# Altium PCB Doublewide.PcbDoc (part 2 of 2)
Units mm, origin at the board's own origin, x right, y up, seen from the top; angles counter-clockwise.
Board outline 97.5 x 70 mm, 6 copper layers (Top (GND), L2-HS, L3-GND, L4-PWR, L5, Bot), stack 1.744 mm thick; 113 components, 172 nets, 522 pads, 114 vias.
Unrouted connection lines stored in the file: 204.
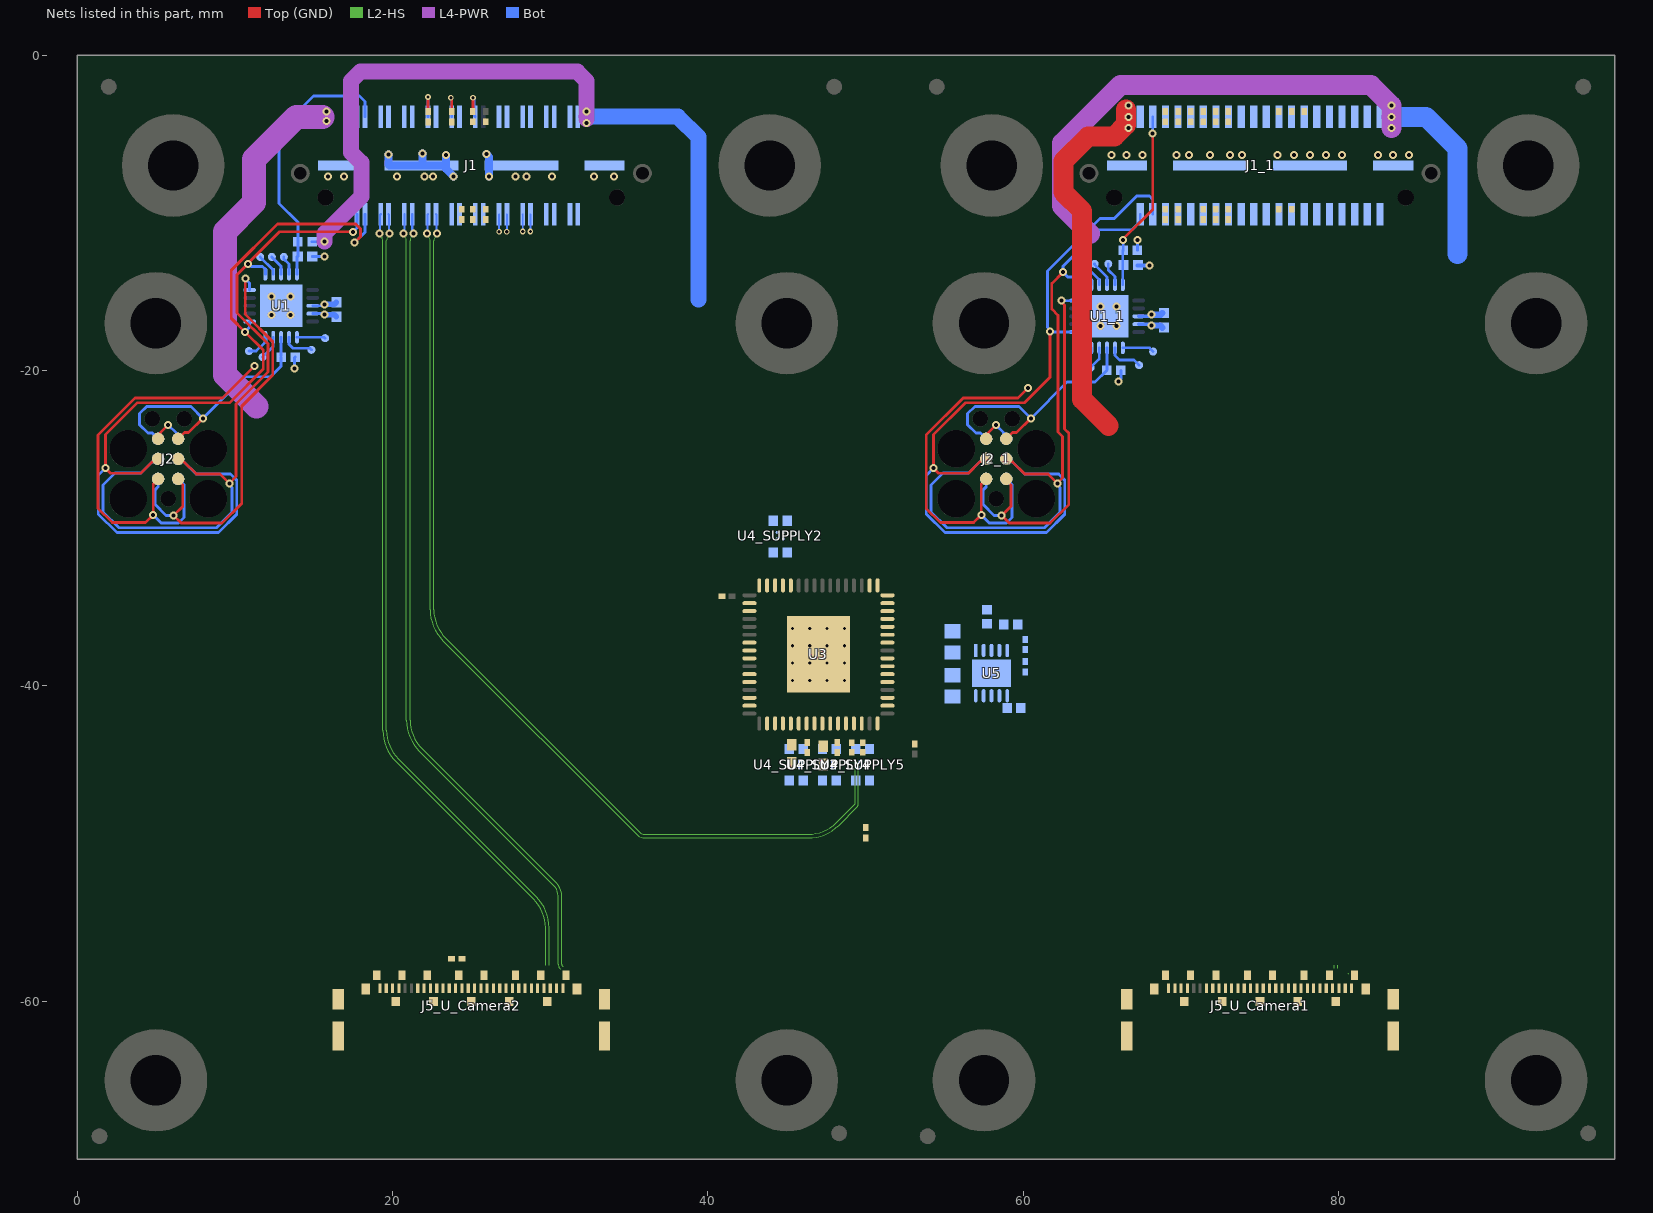
[diagram p4: the nets of this part, all layers, seen from the top]

## Part data
C1 C1_1 C2 C2_1: library part 000070, "Ceramic capacitor", Manufacturer=Kemet, Tolerance (%)=10, ValueFloat=1E-7, Description 2="SM-0402, 10%, 10v", Manufacturer_PN=C0402C104K8PACTU, partnumber=000070
  C1 C1_1: updated_on="5/15/2017 4:50:04 PM"
  C2 C2_1: updated_on="11/17/2016 12:16:56 PM"
C5_SUPPLY2 C5_SUPPLY3 C5_SUPPLY4 C5_SUPPLY5 C6_SUPPLY2 C6_SUPPLY3 C6_SUPPLY4 C6_SUPPLY5 C9 C10 C11: library part GRM155R61A475MEAAD, "CAP CER 4.7UF 10V X5R 0402", Device Package="0402 (1005 Metric)", Manufacturer="Murata Electronics", Operating Temperature="-55°C ~ 85°C", Supplier Part Number 1=490-14306-1-ND, Temperature Coefficient=X5R, Tolerance=±20%, Voltage - Rated=10V, Applications="General Purpose", Capacitance=4.7µF, ComponentLink1Description=Datasheet, ComponentLink1URL=https://search.murata.co.jp/Ceramy/image/img/A01X/G101/ENG/GRM155R61A475MEAA-01.pdf, ComponentLink2Description="DigiKey Link", ComponentLink2URL=https://www.digikey.com/en/products/detail/murata-electronics/GRM155R61A475MEAAD/6234735, LastUpdated="2/8/2022 12:26:50 PM", Lifecycle Status=Active, Minimum Order=1, Mounting Type="Surface Mount, MLCC", Package / Case="0402 (1005 Metric)", Packaging=TapeAndReel, Part Number=GRM155R61A475MEAAD, Part Status=Active, PartId=6746, Price=0.03, Series=GRM, Size / Dimension="0.039\" L x 0.020\" W (1.00mm x 0.50mm)", Supplier 1=DigiKey, Thickness (Max)="0.026\" (0.65mm)"
C7 C8: library part GRM188R60J476ME01D, "CAP CER 47UF 6.3V X5R 0603", Device Package="0603 (1608 Metric)", Manufacturer="Murata Electronics", Operating Temperature="-55°C ~ 85°C", Supplier Part Number 1=490-GRM188R60J476ME01DCT-ND, Temperature Coefficient=X5R, Tolerance=±20%, Voltage - Rated=6.3V, Applications="General Purpose", Capacitance="47 µF", ComponentLink2Description="DigiKey Link", ComponentLink2URL=https://www.digikey.com/en/products/detail/murata-electronics/GRM188R60J476ME01D/13996874, LastUpdated="5/20/2022 2:38:45 PM", Lifecycle Status=Active, Minimum Order=1, Mounting Type="Surface Mount, MLCC", Package / Case="0603 (1608 Metric)", Packaging=TapeAndReel, Part Number=GRM188R60J476ME01D, Part Status=Active, PartId=44498, Price=0.10, Series=GRM, Size / Dimension="0.063\" L x 0.031\" W (1.60mm x 0.80mm)", Supplier 1=DigiKey, Thickness (Max)="0.039\" (1.00mm)"
C14 C15: library part 0201YC103KAT2A, "CAP CER 10000PF 16V X7R 0201", Device Package="0201 (0603 Metric)", Manufacturer="AVX Corporation", Operating Temperature="-55°C ~ 125°C", Supplier Part Number 1=478-10775-1-ND, Temperature Coefficient=X7R, Tolerance=±10%, Voltage - Rated=16V, Applications="General Purpose", Capacitance=10000pF, ComponentLink1Description=Datasheet, ComponentLink1URL=http://datasheets.avx.com/X7RDielectric.pdf, ComponentLink2Description="DigiKey Link", ComponentLink2URL=http://digikey.com/product-detail/en/avx-corporation/0201YC103KAT2A/478-10775-1-ND/7536319, LastUpdated="9/2/2020 1:00:07 AM", Lifecycle Status=Active, Minimum Order=1, Mounting Type="Surface Mount, MLCC", Package / Case="0201 (0603 Metric)", Packaging=TapeAndReel, Part Number=0201YC103KAT2A, Part Status=Active, PartId=145, Price=0.09, Series=-, Size / Dimension="0.024\" L x 0.012\" W (0.60mm x 0.30mm)", Supplier 1=DigiKey, Thickness (Max)="0.013\" (0.33mm)"
FID1 FID1_1 FID2 FID2_1 FID3 FID3_1 FID4 FID4_1 FID5 FID5_1 FID6 FID6_1 FID7 FID7_1 FID8 FID8_1: "PCB fiducial"
J1: library part 001605, "0.5mm hi-speed, high-density header (female)", Manufacturer=Samtec, Manufacturer_PN=QTH-020-01-F-D-DP-A, AligniPartNumber=001605, parttype=Connector
J1_1: library part 000973, Manufacturer=Samtec, created_on="4/3/2013 1:34:16 PM", id=24153, inventory_price=3.86, Manufacturer_PN=QTE-020-01-F-D-A, partnumber=000973, parttype=Connector, RoHS=1, updated_on="2/26/2018 2:13:14 PM"
J2 J2_1: library part 002062, "Tag-Connect 6-pin Plug-of-Nails spring-pin cable footprint", Manufacturer=Tag-Connect, Manufacturer_PN=TC2030-IDC, AligniPartNumber=002062, parttype=Connector
J5_U_Camera1 J5_U_Camera2: library part CMP-004-000000-1, "Cabline-CAII Rece. Ass'y", Package=None, Availability=Unavailable, Design Item ID=20682-030E-02, MF="{'manufacturer': u'I-PEX'}", MP=20682-030E-02, Price=None, Source=20682-030E-02.SchLib
MH1 MH1_1 MH2 MH2_1 MH3 MH3_1 MH4 MH4_1 MH5 MH5_1 MH6 MH6_1: "Mounting hole"
R1 R1_1 R2 R2_1: library part 001521, "Thick-film resistor", Manufacturer=Vishay, Tolerance (%)=1, ValueFloat=10000, Description 2="SM-0402, 1%, 1/16W", Manufacturer_PN=CRCW040210K0FKED, partnumber=001521, updated_on="3/21/2017 2:29:49 PM", x_lifecycle_status=Production
R3_U_Camera1 R3_U_Camera2: library part ERJ-U01J103C, "RES 10K OHM 5% 1/20W 0201 SMD", Device Package="0201 (0603 Metric)", Manufacturer="Panasonic Electronic Components", Operating Temperature="-55°C ~ 125°C", Power (Watts)="0.05W, 1/20W", Supplier Device Package=0201, Supplier Part Number 1=10-ERJ-U01J103CCT-ND, Temperature Coefficient=±200ppm/°C, Tolerance=±5%, ComponentLink1Description=Datasheet, ComponentLink1URL=https://industrial.panasonic.com/cdbs/www-data/pdf/RDP0000/AOA0000C334.pdf, ComponentLink2Description="DigiKey Link", ComponentLink2URL=https://www.digikey.com/en/products/detail/panasonic-electronic-components/ERJ-U01J103C/11635419, Composition="Thick Film", Features=Anti-Sulfur, Height - Seated (Max)="0.010\" (0.26mm)", LastUpdated="5/23/2022 1:02:10 PM", Lifecycle Status=Active, Minimum Order=1, Number of Terminations=2, Package / Case="0201 (0603 Metric)", Packaging=TapeAndReel, Part Number=ERJ-U01J103C, Part Status=Active, PartId=57694, Price=0.03, Resistance="10 kOhms", Series=ERJ-U01, Size / Dimension="0.024\" L x 0.012\" W (0.60mm x 0.30mm)", Supplier 1=DigiKey
R6: library part ERJ-1GNJ154C, "RES SMD 150K OHM 5% 1/20W 0201", Device Package="0201 (0603 Metric)", Manufacturer="Panasonic Electronic Components", Operating Temperature="-55°C ~ 125°C", Power (Watts)="0.05W, 1/20W", Ratings=AEC-Q200, Supplier Device Package=0201, Supplier Part Number 1=P123248CT-ND, Temperature Coefficient=±200ppm/°C, Tolerance=±5%, ComponentLink1Description=Datasheet, ComponentLink1URL=https://b2b-api.panasonic.eu/file_stream/pids/fileversion/1242, ComponentLink2Description="DigiKey Link", ComponentLink2URL=https://www.digikey.com/en/products/detail/panasonic-electronic-components/ERJ-1GNJ154C/2035839, Composition="Thick Film", Features="Automotive AEC-Q200", Height - Seated (Max)="0.010\" (0.26mm)", LastUpdated="8/11/2022 9:03:25 AM", Lifecycle Status=Active, Minimum Order=1, Number of Terminations=2, Package / Case="0201 (0603 Metric)", Packaging=CutTape, Part Number=ERJ-1GNJ154C, Part Status=Active, PartId=332, Price=0.01, Resistance="150 kOhms", Series=ERJ-1GN, Size / Dimension="0.024\" L x 0.012\" W (0.60mm x 0.30mm)", Supplier 1=DigiKey
R7: library part ERJ-1GNF3013C, "RES SMD 301K OHM 1% 1/20W 0201", Device Package="0201 (0603 Metric)", Manufacturer="Panasonic Electronic Components", Operating Temperature="-55°C ~ 125°C", Power (Watts)="0.05W, 1/20W", Ratings=AEC-Q200, Supplier Device Package=0201, Supplier Part Number 1=P122918CT-ND, Temperature Coefficient=±200ppm/°C, Tolerance=±1%, ComponentLink1Description=Datasheet, ComponentLink1URL=https://industrial.panasonic.com/cdbs/www-data/pdf/RDA0000/AOA0000C304.pdf, ComponentLink2Description="DigiKey Link", ComponentLink2URL=https://www.digikey.com/en/products/detail/panasonic-electronic-components/ERJ-1GNF3013C/2036394, Composition="Thick Film", Features="Automotive AEC-Q200", Height - Seated (Max)="0.010\" (0.26mm)", LastUpdated="8/11/2022 9:03:12 AM", Lifecycle Status=Active, Minimum Order=1, Number of Terminations=2, Package / Case="0201 (0603 Metric)", Packaging=TapeAndReel, Part Number=ERJ-1GNF3013C, Part Status=Active, PartId=2352, Price=0.01, Resistance="301 kOhms", Series=ERJ-1GN, Size / Dimension="0.024\" L x 0.012\" W (0.60mm x 0.30mm)", Supplier 1=DigiKey
R10 R11: library part ERJ-2RKF49R9X, "RES SMD 49.9 OHM 1% 1/10W 0402", Device Package="0402 (1005 Metric)", Manufacturer="Panasonic Electronic Components", Operating Temperature="-55°C ~ 155°C", Power (Watts)="0.1W, 1/10W", Ratings=AEC-Q200, Supplier Device Package=0402, Supplier Part Number 1=P49.9LCT-ND, Temperature Coefficient=±100ppm/°C, Tolerance=±1%, ComponentLink1Description=Datasheet, ComponentLink1URL=https://industrial.panasonic.com/cdbs/www-data/pdf/RDA0000/AOA0000C304.pdf, ComponentLink2Description="DigiKey Link", ComponentLink2URL=https://www.digikey.com/en/products/detail/panasonic-electronic-components/ERJ-2RKF49R9X/192382, Composition="Thick Film", Features="Automotive AEC-Q200", Height - Seated (Max)="0.016\" (0.40mm)", LastUpdated="8/11/2022 9:07:22 AM", Lifecycle Status=Active, Minimum Order=1, Number of Terminations=2, Package / Case="0402 (1005 Metric)", Packaging=CutTape, Part Number=ERJ-2RKF49R9X, Part Status=Active, PartId=17623, Price=0.01, Resistance="49.9 Ohms", Series=ERJ-2RK, Size / Dimension="0.039\" L x 0.020\" W (1.00mm x 0.50mm)", Supplier 1=DigiKey
R14_U_Camera1 R14_U_Camera2 R17_U_Camera1 R17_U_Camera2 R18_U_Camera1 R18_U_Camera2 R19_U_Camera1 R19_U_Camera2 R20_U_Camera1 R20_U_Camera2 R21_U_Camera1 R21_U_Camera2 R22_U_Camera1 R22_U_Camera2 R23_U_Camera1 R23_U_Camera2 R24_U_Camera1 R24_U_Camera2 R25 R26 R27 R28 R29 R30 R31 R32 R33 R34: library part CRG0201F10R, "RES SMD 10 OHM 1% 1/20W 0201", Device Package="0201 (0603 Metric)", Manufacturer="TE Connectivity Passive Product", Operating Temperature="-55°C ~ 155°C", Power (Watts)="0.05W, 1/20W", Supplier Device Package=0201, Supplier Part Number 1=A129573CT-ND, Temperature Coefficient=±400ppm/°C, Tolerance=±1%, ComponentLink1Description=Datasheet, ComponentLink1URL=https://www.te.com/commerce/DocumentDelivery/DDEController?Action=srchrtrv&DocNm=1773204&DocType=DS&DocLang=English, ComponentLink2Description="DigiKey Link", ComponentLink2URL=https://www.digikey.com/en/products/detail/te-connectivity-passive-product/CRG0201F10R/4489648, Composition="Thick Film", Height - Seated (Max)="0.010\" (0.26mm)", LastUpdated="8/11/2022 9:03:27 AM", Lifecycle Status=Active, Minimum Order=1, Number of Terminations=2, Package / Case="0201 (0603 Metric)", Packaging=TapeAndReel, Part Number=CRG0201F10R, Part Status=Active, PartId=3, Price=0.03, Resistance="10 Ohms", Series="CRG, Neohm", Size / Dimension="0.024\" L x 0.012\" W (0.60mm x 0.30mm)", Supplier 1=DigiKey
TP5 TP5_1 TP6 TP6_1 TP7 TP7_1 TP8 TP8_1 TP9 TP9_1 TP10 TP10_1 TP11 TP11_1: "Test point, surface-mount, 20mil"
U1 U1_1: library part 001552, "8-bit MCU, 4 KB flash, 256 bytes EEPROM", Manufacturer=Microchip, Manufacturer_PN=ATTINY44A-MU, partnumber=001552, updated_on="5/23/2017 10:51:21 AM", x_lifecycle_status=Production
U3: library part CMP-023-00000-1
U4_SUPPLY2 U4_SUPPLY3 U4_SUPPLY4 U4_SUPPLY5: library part CMP-0786-00016-1, "Ultralow Noise, 200 mA, CMOS Linear Regulator, 2.2 to 5.5 V Vin, 1.8 V Vout, Industrial, 4-pin BGA (CB-4-3), Reel", Manufacturer="Analog Devices", Preset Vout Values (V)=1.8, Supply Current IGND @ Small Load=10uA, ComponentLink1Description="Manufacturer URL", ComponentLink1URL=http://www.analog.com/en/index.html, ComponentLink2Description=Datasheet, ComponentLink2URL=http://www.analog.com/static/imported-files/data_sheets/ADP151.pdf, ComponentLink3Description="Package Specification", ComponentLink3URL=http:/www.analog.com/static/imported-files/packages/PKG_PDF/WLCSP(CB)/CB_4_3.pdf, ComponentLink4Description="URL Link1", ComponentLink4URL="Product URL:http://www.analog.com/en/ADP151/productSearch.html", DatasheetVersion="Rev. E", Iout max=200mA, Mounting Technology="Surface Mount", PackageDescription="4-Ball Wafer Level Chip Scale Package, Body 0.76 x 0.76 mm, Pitch 0.4 mm", PackageReference=CB-4-3, PackageVersion="011409-A, 01/2009", Packing=Reel, partnumber=ADP151ACBZ-1.8-R7, Vin (max) (V)=5.5, Vin (min) (V)=2.2
U5: library part CMP-019-00054-1, "LDO Regulator Pos 1.2V to 3.3V 1.2A 10-Pin LFCSP EP T/R"

## Via types
v1: diameter 0.508, hole 0.254, Top (GND) to Bot, tented both sides, 84 vias
v2: diameter 0.5, hole 0.2, Top (GND) to Bot, 16 vias
v3: diameter 0.356, hole 0.203, Top (GND) to Bot, 8 vias
v4: diameter 0.508, hole 0.254, Top (GND) to Bot, 6 vias

## Nets (pads, with @x,y where several pads share a name; then routed paths per layer and width w, separated by ;. In a path a pad name is that pad's centre, name@x,y a point inside that pad or via, vN(x,y) a via of type N, cw(c..) or ccw(c..) an arc to the next point about the centre after c; other vN are vias at no path point)
1V8_IN: C6_SUPPLY2.2 U3.13 U4_SUPPLY2.A2
1V8_OUT3: C6_SUPPLY3.2 U3.36 U4_SUPPLY3.A2
1V8_OUT4: C6_SUPPLY4.2 U3.40 U4_SUPPLY4.A2
1V8_OUT5: C6_SUPPLY5.2 U3.43 U4_SUPPLY5.A2
1V8_PLL: C8.2 U3.46 U3.60 U5.1 U5.2 U5.3
+1.8: J5_U_Camera1.26 J5_U_Camera2.26
+3.3: C5_SUPPLY2.2 C5_SUPPLY3.2 C5_SUPPLY4.2 C5_SUPPLY5.2 C7.2 U4_SUPPLY2.A1 U4_SUPPLY2.B1 U4_SUPPLY3.A1 U4_SUPPLY3.B1 U4_SUPPLY4.A1 U4_SUPPLY4.B1 U4_SUPPLY5.A1 U4_SUPPLY5.B1 U5.5 U5.9 U5.10 | length 1.6
  Bot w0.229: 67.302,-17.061 68.037,-17.061 68.121,-17.145
  Bot w0.406: 68.121,-17.145 68.677,-17.145 68.807,-17.275
+3.3V: C2.2 C2_1.2 J1.40 J1_1.40 J2.2 J2_1.2 R1.2 R1_1.2 R2.2 R2_1.2 U1.9 U1_1.9 | length 145.7
  Top (GND) w0.178: J2.2@5.14,-26.87 4.826,-27.184 v1(4.826,-29.159) 4.343,-29.642 2.235,-29.642 1.333,-28.74 1.333,-24.093 3.684,-21.742 9.22,-21.742 v1(11.252,-19.71) ; J2_1.2@57.64,-26.87 57.326,-27.184 v1(57.326,-29.159) 56.843,-29.642 54.735,-29.642 53.833,-28.74 53.833,-24.093 56.184,-21.742 59.658,-21.742 v1(60.3,-21.1)
  L4-PWR w1.016: v1(15.672,-11.811) 15.672,-11.328 18.02,-8.98 18.02,-6.82 17.362,-6.162 17.362,-1.645 17.957,-1.05 31.714,-1.05 32.309,-1.645 32.309,-4.039
  L4-PWR w1.27: 64.209,-11.328 62.457,-9.576 62.457,-5.588 66.14,-1.905 82.031,-1.905 v1(83.329,-3.204) ; v1(83.336,-4.615) v1@83.336,-3.204
  Bot w0.178: v1(4.826,-29.159) 5.334,-29.667 6.427,-29.667 6.782,-29.312 6.782,-27.242 J2.2@6.41,-26.87 ; v1(13.792,-19.856) 13.792,-19.189 R2.2@13.836,-19.145 ; R1.2@14.903,-11.83 v1@15.596,-11.83 ; U1.9@14.937,-16.392 15.629,-16.392 v1(15.7,-16.462) ; v1(57.326,-29.159) 57.834,-29.667 58.927,-29.667 59.282,-29.312 59.282,-27.242 J2_1.2@58.91,-26.87 ; v1(66.013,-20.701) 66.183,-20.53 R2_1.2@66.183,-19.99 ; R1_1.2@67.225,-12.37 67.225,-11.717 v1(67.232,-11.709)
  Bot w0.356: v1(15.7,-16.462) 16.306,-16.462 C2.2@16.436,-16.592
  Bot w1.016: 32.3,-3.895 38.095,-3.895 39.4,-5.2 39.4,-15.5
  Bot w1.27: v1(83.329,-3.915) 85.523,-3.915 87.527,-5.918 87.527,-12.598
  other v1: 68.121,-17.145 32.283,-4.311 32.283,-3.575
+5: J5_U_Camera1.1 J5_U_Camera1.2 J5_U_Camera2.1 J5_U_Camera2.2
+5V: J1.2 J1_1.2 | length 46.6
  Top (GND) w1.27: 65.4,-23.5 63.727,-21.827 63.727,-9.881 62.533,-8.687 62.533,-6.731 64.108,-5.156 65.759,-5.156 66.495,-4.42 66.495,-3.454
  L4-PWR w1.524: 11.379,-22.276 9.373,-20.269 9.373,-11.201 11.227,-9.347 11.227,-6.604 13.919,-3.912 15.549,-3.912
  other v1: 66.673,-4.616 15.815,-4.178 66.667,-3.916 15.815,-3.587 66.673,-3.194
C2P_CLKN: J1.36
C2P_CLKN_1: J1_1.36
C2P_CLKP: J1.34
C2P_CLKP_1: J1_1.34
CSB: R34.2 U3.19
EN_1: J1.14 R14_U_Camera2.1 | length 2.2
  Top (GND) w0.172: R14_U_Camera2.1@22.25,-3.585 22.252,-3.583 v3(22.252,-2.659)
  Bot w0.172: J1.14@22.25,-3.91 22.25,-2.661 v3(22.252,-2.659)
EN_2: J1.18 R14_U_Camera1.1 | length 2.1
  Top (GND) w0.172: v3(23.7,-2.7) cw(c23.579,-2.821) 23.75,-2.821 R14_U_Camera1.1@23.75,-3.585
  Bot w0.172: v3(23.7,-2.7) cw(c23.579,-2.821) 23.75,-2.821 J1.18@23.75,-3.91
EN_U_Camera1: J5_U_Camera1.7 R14_U_Camera1.2
EN_U_Camera2: J5_U_Camera2.7 R14_U_Camera2.2
FDEC: U3.25
FINC: U3.48
FLEXIO14: U3.55
FLEXIO15: U3.56
GND: C1.1 C1_1.1 C2.1 C2_1.1 C5_SUPPLY2.1 C5_SUPPLY3.1 C5_SUPPLY4.1 C5_SUPPLY5.1 C6_SUPPLY2.1 C6_SUPPLY3.1 C6_SUPPLY4.1 C6_SUPPLY5.1 C7.1 C8.1 C9.1 C10.1 C11.1 J1.0 J1_1.0 J2.6 J2_1.6 J5_U_Camera1.3 J5_U_Camera1.4 J5_U_Camera1.S1 J5_U_Camera1.S2 J5_U_Camera1.S3 J5_U_Camera1.S4 J5_U_Camera1.S5 J5_U_Camera1.S6 J5_U_Camera1.S7 J5_U_Camera1.S8 J5_U_Camera1.S9 J5_U_Camera1.S10 J5_U_Camera1.S11 J5_U_Camera1.S12 J5_U_Camera1.S13 J5_U_Camera1.S14 J5_U_Camera1.S15 J5_U_Camera1.S16 J5_U_Camera1.S17 J5_U_Camera1.S18 J5_U_Camera1.S19 J5_U_Camera2.3 J5_U_Camera2.4 J5_U_Camera2.S1 J5_U_Camera2.S2 J5_U_Camera2.S3 J5_U_Camera2.S4 J5_U_Camera2.S5 J5_U_Camera2.S6 J5_U_Camera2.S7 J5_U_Camera2.S8 J5_U_Camera2.S9 J5_U_Camera2.S10 J5_U_Camera2.S11 J5_U_Camera2.S12 J5_U_Camera2.S13 J5_U_Camera2.S14 J5_U_Camera2.S15 J5_U_Camera2.S16 J5_U_Camera2.S17 J5_U_Camera2.S18 J5_U_Camera2.S19 R3_U_Camera1.1 R3_U_Camera2.1 R7.1 R10.1 R11.1 U1.8 U1.PAD U1_1.8 U1_1.PAD U3.39 U3.65 U4_SUPPLY2.B2 U4_SUPPLY3.B2 U4_SUPPLY4.B2 U4_SUPPLY5.B2 U5.11 | length 17.4
  Top (GND) w0.178: J2.6@5.14,-24.33 5.257,-24.213 5.257,-23.953 v1(5.766,-23.444) ; J2_1.6@57.64,-24.33 57.757,-24.213 57.757,-23.953 v1(58.266,-23.444)
  Bot w0.178: v1(5.766,-23.444) 6.293,-23.972 6.293,-24.213 J2.6@6.41,-24.33 ; C1.1@14.913,-12.776 v1(15.672,-12.776) ; U1.8@14.937,-15.892 15.609,-15.892 v1(15.7,-15.802) ; v1(58.266,-23.444) 58.266,-23.466 58.731,-23.931 58.731,-23.986 58.91,-24.165 J2_1.6@58.91,-24.33
  Bot w0.229: U1_1.8@67.302,-16.561 68.019,-16.561 v1(68.121,-16.459)
  Bot w0.254: C1_1.1@67.235,-13.335 v1(67.994,-13.335)
  Bot w0.356: v1(15.7,-15.802) 16.306,-15.802 C2.1@16.436,-15.672
  Bot w0.406: v1(68.121,-16.459) 68.702,-16.459 C2_1.1@68.807,-16.355
  Bot w0.508: v1(19.75,-6.3) 19.75,-6.934 19.816,-7 J1.0@21.83,-7 J1.0@21.95,-7 ; v1(21.9,-6.25) 21.9,-6.95 J1.0@21.95,-7 ; J1.0@23.334,-7 J1.0@21.95,-7 ; v1(23.4,-6.325) 23.4,-7.224 v1(23.876,-7.7) ; v1(25.95,-6.275) 26.122,-6.447 v1(26.122,-7.7)
  other v1: 64.895,-17.161 65.902,-17.161 12.337,-16.492 13.537,-16.492 64.895,-15.951 65.902,-15.951 12.337,-15.292 13.537,-15.292 15.9,-7.699 16.911,-7.699 20.295,-7.7 22.022,-7.703 22.575,-7.703 27.8,-7.7 28.5,-7.7 30.099,-7.7 32.766,-7.7 34.036,-7.7 65.581,-6.35 66.546,-6.35 67.537,-6.35 69.696,-6.35 70.483,-6.35 71.829,-6.35 73.099,-6.35 73.861,-6.35 76.118,-6.35 77.159,-6.35 78.175,-6.35 79.191,-6.35 80.207,-6.35 82.48,-6.35 83.445,-6.35 84.436,-6.35
  other v2: 45.35,-39.65 46.45,-39.65 47.55,-39.65 48.65,-39.65 45.35,-38.55 46.45,-38.55 47.55,-38.55 48.65,-38.55 45.35,-37.45 46.45,-37.45 47.55,-37.45 48.65,-37.45 45.35,-36.35 46.45,-36.35 47.55,-36.35 48.65,-36.35
IN0_N: U3.64
IN0_P: U3.63
IN1_N: U3.2
IN1_P: U3.1
IN2_N: U3.15
IN2_P: U3.14
IN3_N: U3.62
IN3_P: U3.61
IN_SEL0: R25.2 U3.3
IN_SEL0: J1_1.23 R25.1
IN_SEL1: R26.2 U3.4
IN_SEL1: J1_1.25 R26.1
INCK1: R24_U_Camera2.1 U3.38
INCK2: R24_U_Camera1.1 U3.42
INCK_U_Camera1: J5_U_Camera1.25 R24_U_Camera1.2
INCK_U_Camera2: J5_U_Camera2.25 R24_U_Camera2.2
INTRB: U3.12
LOLB: R27.2 U3.47
LOLB: J1_1.30 R27.1
MCU_MISO: J2.1 U1.20 | length 27.5
  Top (GND) w0.178: J2.1@6.41,-26.87 6.41,-26.961 6.706,-27.257 6.706,-28.6 v1(6.121,-29.185) 6.604,-29.667 9.195,-29.667 10.439,-28.423 10.439,-22.261 12.41,-20.29 12.41,-18.179 10.668,-16.437 v1(10.668,-14.173)
  Bot w0.178: J2.1@5.14,-26.87 5.14,-27.372 4.953,-27.559 4.953,-28.499 5.639,-29.185 v1(6.121,-29.185) ; v1(10.668,-14.173) 10.937,-14.442 U1.20@10.937,-14.892
MCU_MISO_1: J2_1.1 U1_1.20 | length 24.8
  Top (GND) w0.178: J2_1.1@58.91,-26.87 58.91,-26.961 59.206,-27.257 59.206,-28.6 v1(58.621,-29.185) 59.104,-29.667 61.695,-29.667 62.877,-28.485 62.877,-23.977 62.6,-23.7 62.6,-15.839 62.406,-15.645 v1(62.406,-15.57)
  Bot w0.178: J2_1.1@57.64,-26.87 57.64,-27.372 57.453,-27.559 57.453,-28.499 58.139,-29.185 v1(58.621,-29.185) ; v1(62.406,-15.57) 63.292,-15.57 U1_1.20@63.302,-15.561
MCU_RESET_B: J2.5 R2.1 U1.13 | length 16.9
  Top (GND) w0.178: J2.5@6.41,-24.33 6.803,-23.937 7.058,-23.937 7.963,-23.032 v1(7.969,-23.032)
  Bot w0.178: J2.5@5.14,-24.33 5.132,-24.33 4.767,-23.964 4.493,-23.964 3.962,-23.433 3.962,-22.733 4.42,-22.276 7.214,-22.276 v1(7.969,-23.032) 10.605,-20.396 12.268,-20.396 12.936,-19.729 R2.1@12.936,-19.145 ; R2.1@12.937,-19.043 U1.13@12.937,-17.892
MCU_RESET_B_1: J2_1.5 R2_1.1 U1_1.13 | length 16.3
  Top (GND) w0.178: J2_1.5@58.91,-24.33 59.303,-23.937 59.558,-23.937 60.463,-23.032 v1(60.469,-23.032)
  Bot w0.178: J2_1.5@57.64,-24.33 57.632,-24.33 57.267,-23.964 56.993,-23.964 56.462,-23.433 56.462,-22.733 56.92,-22.276 59.714,-22.276 v1(60.469,-23.032) 62.767,-20.734 64.54,-20.734 R2_1.1@65.283,-19.99 ; R2_1.1@65.302,-19.972 U1_1.13@65.302,-18.561
MCU_SCL_USCK: J1.1 J2.3 U1.1 | length 47
  Top (GND) w0.178: J2.3@6.41,-25.6 6.575,-25.6 6.773,-25.798 6.79,-25.798 7.56,-26.568 9.068,-26.568 v1(9.652,-27.153) 10.084,-26.721 10.084,-22.116 12.105,-20.095 12.105,-18.305 10.148,-16.348 10.148,-13.931 v1(10.846,-13.233) ; v1@10.802,-13.233 12.834,-11.201 v1(17.501,-11.201)
  Bot w0.178: J2.3@5.14,-25.6 4.975,-25.6 4.781,-25.794 4.756,-25.794 4.05,-26.5 2.4,-26.5 1.641,-27.259 1.641,-28.965 2.648,-29.972 8.829,-29.972 9.817,-28.983 9.817,-27.407 9.652,-27.242 v1(9.652,-27.153) ; v1(10.846,-13.233) 11.017,-13.405 11.76,-13.405 11.937,-13.581 U1.1@11.937,-13.892 ; v1(17.501,-11.201) 17.75,-10.952 J1.1@17.75,-10.09
MCU_SCL_USCK_1: J1_1.1 J2_1.3 U1_1.1 | length 44
  Top (GND) w0.178: J2_1.3@58.91,-25.6 59.075,-25.6 59.263,-25.788 59.301,-25.788 60.081,-26.568 61.568,-26.568 v1(62.152,-27.153) 62.483,-26.821 62.483,-24.183 62.2,-23.9 62.2,-16.5 61.8,-16.1 61.8,-14.474 v1(62.508,-13.767)
  Bot w0.178: J2_1.3@57.64,-25.6 57.475,-25.6 57.296,-25.779 57.241,-25.779 56.519,-26.5 54.9,-26.5 54.141,-27.259 54.141,-28.965 55.148,-29.972 61.329,-29.972 62.317,-28.983 62.317,-27.407 62.152,-27.242 v1(62.152,-27.153) ; U1_1.1@64.302,-14.561 64.302,-14.265 64.108,-14.072 62.812,-14.072 v1(62.508,-13.767) 62.508,-13.386 64.819,-11.074 66.876,-11.074 67.4,-10.55 J1_1.1@67.4,-10.09
MCU_SDA_MOSI: J1.3 J2.4 U1.16 | length 57.5
  Top (GND) w0.178: J2.4@5.14,-25.6 4.975,-25.6 4.781,-25.794 4.756,-25.794 4.032,-26.518 2.134,-26.518 v1(1.803,-26.187) 1.803,-24.054 3.81,-22.047 9.653,-22.047 11.8,-19.9 11.8,-18.709 v1(10.643,-17.551) 9.773,-16.682 9.773,-13.642 12.715,-10.7 17.664,-10.7 17.971,-11.007 17.971,-11.515 v1(17.6,-11.885)
  Bot w0.178: v1(1.803,-26.187) 1.336,-26.655 1.336,-29.091 2.521,-30.276 8.955,-30.276 10.122,-29.11 10.122,-26.958 9.732,-26.568 7.554,-26.568 6.787,-25.801 6.776,-25.801 6.575,-25.6 J2.4@6.41,-25.6 ; v1(10.643,-17.551) 10.937,-17.257 U1.16@10.937,-16.892 U1.16@10.929,-16.884 ; v1(17.6,-11.885) 18.25,-11.235 J1.3@18.25,-10.09
MCU_SDA_MOSI_1: J1_1.3 J2_1.4 U1_1.16 | length 52.3
  Top (GND) w0.178: J2_1.4@57.64,-25.6 57.475,-25.6 57.297,-25.778 57.239,-25.778 56.5,-26.518 54.634,-26.518 v1(54.303,-26.187) 54.303,-24.054 56.31,-22.047 60.053,-22.047 61.677,-20.423 v1(61.677,-17.513)
  Bot w0.178: v1(54.303,-26.187) 53.836,-26.655 53.836,-29.091 55.021,-30.276 61.455,-30.276 62.622,-29.11 62.622,-26.958 62.232,-26.568 60.077,-26.568 59.298,-25.79 59.265,-25.79 59.075,-25.6 J2_1.4@58.91,-25.6 ; U1_1.16@63.302,-17.561 63.292,-17.551 61.716,-17.551 61.716,-17.462 61.517,-17.264 61.517,-13.691 64.844,-10.363 65.759,-10.363 67.181,-8.941 67.994,-8.941 68.2,-9.147 J1_1.3@68.2,-10.09
NetC9_2: C9.2 R6.2 U5.7
NetC10_2: C10.2 U5.4
NetC11_2: C11.2 U5.8
NetR6_1: R6.1 R7.2 U5.6
NetTP5_1: TP5.1 U1.11 | length 1.8
  Bot w0.178: U1.11@13.937,-17.892 15.664,-17.892 TP5.1@15.723,-17.951
NetTP5_1_1: TP5_1.1 U1_1.11 | length 2
  Bot w0.178: U1_1.11@66.302,-18.561 67.987,-18.561 TP5_1.1@68.223,-18.796
NetTP6_1: TP6.1 U1.4 | length 1.2
  Bot w0.178: TP6.1@13.106,-12.795 13.106,-12.922 13.437,-13.252 U1.4@13.437,-13.892
NetTP6_1_1: TP6_1.1 U1_1.4 | length 1.5
  Bot w0.178: TP6_1.1@65.378,-13.233 65.378,-13.614 65.802,-14.038 U1_1.4@65.802,-14.561
NetTP7_1: TP7.1 U1.12 | length 2
  Bot w0.178: U1.12@13.437,-17.892 13.437,-18.332 13.691,-18.586 14.757,-18.586 TP7.1@14.859,-18.688
NetTP7_1_1: TP7_1.1 U1_1.12 | length 2.3
  Bot w0.178: U1_1.12@65.802,-18.561 65.802,-19.042 66.089,-19.329 67.003,-19.329 TP7_1.1@67.334,-19.66
NetTP8_1: TP8.1 U1.3 | length 1.3
  Bot w0.178: TP8.1@12.344,-12.795 12.937,-13.387 U1.3@12.937,-13.892
NetTP8_1_1: TP8_1.1 U1_1.3 | length 1.7
  Bot w0.178: TP8_1.1@64.514,-13.233 64.514,-13.284 65.302,-14.072 U1_1.3@65.302,-14.561
NetTP9_1: TP9.1 U1.14 | length 1.5
  Bot w0.178: TP9.1@11.76,-19.145 12.437,-18.469 U1.14@12.437,-17.892
NetTP9_1_1: TP9_1.1 U1_1.14 | length 1.5
  Bot w0.178: TP9_1.1@64.26,-19.812 64.802,-19.271 U1_1.14@64.802,-18.561
NetTP10_1: TP10.1 U1.2 | length 1.4
  Bot w0.178: TP10.1@11.608,-12.795 12.437,-13.624 U1.2@12.437,-13.892
NetTP10_1_1: TP10_1.1 U1_1.2 | length 1.9
  Bot w0.178: TP10_1.1@63.651,-13.233 63.803,-13.233 64.802,-14.232 U1_1.2@64.802,-14.561
NetTP11_1: TP11.1 U1.15 | length 1.6
  Bot w0.178: TP11.1@10.897,-18.764 11.354,-18.764 11.937,-18.181 U1.15@11.937,-17.892
NetTP11_1_1: TP11_1.1 U1_1.15 | length 1.6
  Bot w0.178: TP11_1.1@63.346,-19.812 64.302,-18.856 U1_1.15@64.302,-18.561
OEB: R28.2 U3.11
OEB: J1_1.24 R28.1
OUT0_N: U3.27
OUT0_P: U3.28
OUT0B_N: U3.23
OUT0B_P: U3.24
OUT0T_N: U3.58
OUT0T_P: U3.59
OUT1_N: U3.30
OUT1_P: U3.31
OUT2_N: U3.34
OUT2_P: U3.35
OUT3_N: R10.2 U3.37
OUT4_N: R11.2 U3.41
OUT5_N: C14.1 U3.44
OUT5_P: C15.1 U3.45
OUT6_N: U3.50
OUT6_P: U3.51
OUT7_N: U3.53
OUT7_P: U3.54
P2C_CLKN: J1.35
P2C_CLKN_1: J1_1.35
P2C_CLKP: J1.33
P2C_CLKP_1: J1_1.33
PGOOD_1: J1.16 J5_U_Camera2.8
PGOOD_2: J1.20 J5_U_Camera1.8
R_GA: C1.2 J1.4 R1.1 U1.5 | length 17.1
  Bot w0.178: U1.5@13.937,-13.892 C1.2@13.937,-12.785 ; R1.1@13.987,-11.845 R1.1@14,-11.832 ; C1.2@13.993,-12.776 14,-12.769 R1.1@14,-11.832 ; R1.1@14.003,-11.83 R1.1@14,-11.832 ; J1.4@18.25,-3.91 18.25,-2.95 17.9,-2.6 15,-2.6 12.8,-4.8 12.8,-9.4 14,-10.6 R1.1@14,-11.832
R_GA_1: C1_1.2 J1_1.4 R1_1.1 U1_1.5 | length 11.4
  Top (GND) w0.178: v1@66.318,-11.659 68.197,-9.779 v1(68.197,-4.978)
  Bot w0.178: U1_1.5@66.302,-14.561 66.302,-12.393 R1_1.1@66.325,-12.37 66.325,-11.666 v1@66.318,-11.659 ; v1(68.197,-4.978) 68.2,-4.975 J1_1.4@68.2,-3.91
  other v1: 66.318,-11.709
REFCLK_N: C14.2 J1.15 | length 61.4
  L2-HS w0.073: v4(22.818,-11.3) cw(c22.571,-11.3) 22.745,-11.474 ccw(c23.057,-11.785) 22.616,-11.785 22.616,-35.164 ccw(c25.156,-35.164) 23.36,-36.96 35.7,-49.3 ccw(c35.941,-49.059) 35.941,-49.4 46.348,-49.4 ccw(c46.348,-46.86) 48.144,-48.656 49.3,-47.5 49.3,-45
  Bot w0.133: J1.15@22.75,-10.09 22.784,-10.124 22.784,-11.266 v4(22.818,-11.3)
REFCLK_P: C15.2 J1.13 | length 62.3
  L2-HS w0.073: v4(22.183,-11.3) ccw(c22.429,-11.3) 22.255,-11.474 cw(c21.943,-11.785) 22.384,-11.785 22.384,-35.164 ccw(c25.156,-35.164) 23.196,-37.125 35.535,-49.465 ccw(c35.941,-49.059) 35.941,-49.633 46.348,-49.633 ccw(c46.348,-46.86) 48.309,-48.821 49.465,-47.665 ccw(c49.3,-47.5) 49.533,-47.5 49.533,-45 ccw(c49.3,-45) 49.465,-44.835
  Bot w0.133: v4(22.183,-11.3) 22.216,-11.266 22.216,-10.124 J1.13@22.25,-10.09
RSTB: R29.2 U3.6
RSTB: J1_1.26 R29.1
RSVD_37: J1.37
RSVD_37_1: J1_1.37
RSVD_38: J1.38
RSVD_38_1: J1_1.38
RX0_N: J1.7 J5_U_Camera2.30 | length 51.7
  L2-HS w0.073: v4(19.818,-11.3) cw(c19.571,-11.3) 19.745,-11.474 ccw(c20.057,-11.785) 19.616,-11.785 19.616,-42.814 ccw(c22.156,-42.814) 20.36,-44.61 29.121,-53.371 cw(c27.16,-55.332) 29.933,-55.332 29.933,-57.7
  Bot w0.133: J1.7@19.75,-10.09 19.784,-10.124 19.784,-11.266 v4(19.818,-11.3)
RX0_P: J1.5 J5_U_Camera2.29 | length 51.7
  L2-HS w0.073: v4(19.183,-11.3) ccw(c19.429,-11.3) 19.255,-11.474 cw(c18.943,-11.785) 19.384,-11.785 19.384,-42.814 ccw(c22.156,-42.814) 20.196,-44.775 28.956,-53.535 cw(c27.16,-55.332) 29.7,-55.332 29.7,-57.7
  Bot w0.133: v4(19.183,-11.3) 19.216,-11.266 19.216,-10.124 J1.5@19.25,-10.09
RX1_N: J1.11 J5_U_Camera2.28 | length 51.6
  L2-HS w0.073: v4(21.318,-11.3) cw(c21.071,-11.3) 21.245,-11.474 ccw(c21.557,-11.785) 21.116,-11.785 21.116,-42.164 ccw(c23.656,-42.164) 21.86,-43.96 30.4,-52.5 cw(c29.596,-53.304) 30.733,-53.304 30.733,-57.638 ccw(c30.962,-57.638) 30.8,-57.8
  Bot w0.133: J1.11@21.25,-10.09 21.25,-11.232 v4(21.318,-11.3)
RX1_P: J1.9 J5_U_Camera2.27 | length 51.8
  L2-HS w0.073: v4(20.683,-11.3) ccw(c20.929,-11.3) 20.755,-11.474 cw(c20.443,-11.785) 20.884,-11.785 20.884,-42.164 ccw(c23.656,-42.164) 21.696,-44.125 30.235,-52.665 cw(c29.596,-53.304) 30.5,-53.304 30.5,-57.638 ccw(c30.962,-57.638) 30.635,-57.965
  Bot w0.133: v4(20.683,-11.3) 20.75,-11.233 J1.9@20.75,-10.09
RX2_N: J1.31 J5_U_Camera1.30 | length 1.1
  Bot w0.119: v3(28.741,-11.188) 28.741,-10.099 J1.31@28.75,-10.09
RX2_P: J1.29 J5_U_Camera1.29 | length 1.1
  L2-HS w0.073: 80.567,-58.22 80.585,-58.238
  Bot w0.119: J1.29@28.25,-10.09 28.259,-10.099 v3(28.259,-11.188)
RX3_N: J1.27 J5_U_Camera1.28 | length 1.3
  L2-HS w0.073: 79.933,-57.9 79.933,-57.69
  Bot w0.119: v3(27.241,-11.2) 27.246,-11.196 27.246,-10.094 J1.27@27.25,-10.09
RX3_P: J1.25 J5_U_Camera1.27 | length 1.3
  L2-HS w0.073: 79.7,-57.9 79.7,-57.69
  Bot w0.119: J1.25@26.75,-10.09 26.754,-10.094 26.754,-11.196 v3(26.759,-11.2)
S22: J1_1.27
S24: J1_1.29
S26: J1_1.31
S27: J1_1.32
SCK: J5_U_Camera1.9 J5_U_Camera2.9
SCLK: J1.24 R31.1 | length 2.1
  Top (GND) w0.172: R31.1@25.9,-3.575 v3(25.9,-2.7)
  Bot w0.172: J1.24@25.75,-3.91 25.814,-3.846 25.814,-2.836 25.9,-2.75 v3(25.9,-2.7)
SCLK: R31.2 U3.16
SDAIO: R32.2 U3.18
SDI: J1.22 J5_U_Camera1.10 J5_U_Camera2.10 R32.1 | length 2.1
  Top (GND) w0.172: R32.1@25.1,-3.575 v3(25.1,-2.7)
  Bot w0.172: v3(25.1,-2.7) 25.1,-2.75 25.186,-2.836 25.186,-3.846 J1.22@25.25,-3.91
SDO: R33.2 U3.17
SDO: J1.17 J5_U_Camera1.12 J5_U_Camera2.12 R33.1
SLAMODE0_U_Camera1: J5_U_Camera1.13 J5_U_Camera1.20 J5_U_Camera1.22 R3_U_Camera1.2
SLAMODE0_U_Camera2: J5_U_Camera2.13 J5_U_Camera2.20 J5_U_Camera2.22 R3_U_Camera2.2
SYNCB: R30.2 U3.5
SYNCB: J1_1.28 R30.1
TOUT0_1: J1_1.18 J5_U_Camera2.14
TOUT0_2: J1_1.17 J5_U_Camera1.14
TOUT1_1: J1_1.20 J5_U_Camera2.16
TOUT1_2: J1_1.19 J5_U_Camera1.16
TOUT2_1: J1_1.22 J5_U_Camera2.18
TOUT2_2: J1_1.21 J5_U_Camera1.18
TX0N: J1.8
TX0P: J1.6
TX1N: J1.12
TX1P: J1.10
TX2N: J1.32
TX2P: J1.30
TX3N: J1.28
TX3P: J1.26
VIO: J1.39 J1_1.39
XCE_1: J1.19 R17_U_Camera2.1
XCE_2: J1.21 R17_U_Camera1.1
XCE_CLK: J1.23 R34.1
XCE_U_Camera1: J5_U_Camera1.11 R17_U_Camera1.2
XCE_U_Camera2: J5_U_Camera2.11 R17_U_Camera2.2
XCLR_1: J1_1.14 R23_U_Camera2.1
XCLR_2: J1_1.13 R23_U_Camera1.1
XCLR_U_Camera1: J5_U_Camera1.24 R23_U_Camera1.2
XCLR_U_Camera2: J5_U_Camera2.24 R23_U_Camera2.2
XHS_1: J1_1.10 R21_U_Camera2.1
XHS_2: J1_1.9 R21_U_Camera1.1
XHS_U_Camera1: J5_U_Camera1.21 R21_U_Camera1.2
XHS_U_Camera2: J5_U_Camera2.21 R21_U_Camera2.2
XMASTER_1: J1_1.16 R18_U_Camera2.1
XMASTER_2: J1_1.15 R18_U_Camera1.1
XMASTER_U_Camera1: J5_U_Camera1.15 R18_U_Camera1.2
XMASTER_U_Camera2: J5_U_Camera2.15 R18_U_Camera2.2
XTRIG1_1: J1_1.8 R20_U_Camera2.1
XTRIG1_2: J1_1.7 R20_U_Camera1.1
XTRIG1_U_Camera1: J5_U_Camera1.19 R20_U_Camera1.2
XTRIG1_U_Camera2: J5_U_Camera2.19 R20_U_Camera2.2
XTRIG2_1: J1_1.6 R19_U_Camera2.1
XTRIG2_2: J1_1.5 R19_U_Camera1.1
XTRIG2_U_Camera1: J5_U_Camera1.17 R19_U_Camera1.2
XTRIG2_U_Camera2: J5_U_Camera2.17 R19_U_Camera2.2
XVS_1: J1_1.12 R22_U_Camera2.1
XVS_2: J1_1.11 R22_U_Camera1.1
XVS_U_Camera1: J5_U_Camera1.23 R22_U_Camera1.2
XVS_U_Camera2: J5_U_Camera2.23 R22_U_Camera2.2
pads on no net: FID1.FID? FID1_1.FID? FID2.FID? FID2_1.FID? FID3.FID? FID3_1.FID? FID4.FID? FID4_1.FID? FID5.FID? FID5_1.FID? FID6.FID? FID6_1.FID? FID7.FID? FID7_1.FID? FID8.FID? FID8_1.FID? J1.MH J1_1.MH J2.A J2.B J2.C J2.D J2.E J2.F J2.G J2_1.A J2_1.B J2_1.C J2_1.D J2_1.E J2_1.F J2_1.G J5_U_Camera1.5 J5_U_Camera1.6 J5_U_Camera2.5 J5_U_Camera2.6 MH1.1 MH1_1.1 MH2.1 MH2_1.1 MH3.1 MH3_1.1 MH4.1 MH4_1.1 MH5.1 MH5_1.1 MH6.1 MH6_1.1 U1.6 U1.7 U1.10 U1.17 U1.18 U1.19 U1_1.6 U1_1.7 U1_1.10 U1_1.17 U1_1.18 U1_1.19 U3.7 U3.8 U3.9 U3.10 U3.20 U3.21 U3.22 U3.26 U3.29 U3.32 U3.33 U3.49 U3.52 U3.57

## Polygon pours and split planes (outlines as drawn)
no net on L4-PWR "L3_+3.3V" (solid, pour order 7): 61.822,-8.636 61.822,-12.548 59.7,-14.669 59.7,-23.825 64.641,-23.825 69.01,-19.456 69.01,-13.284 68.578,-12.852 68.578,-8.636
no net on L4-PWR "L3_+3.3V" (solid, pour order 0): 17.069,-18.631 17.069,-16.002 17.069,-11.938 18.7,-10.307 18.7,-6.711 17.069,-5.08 14.554,-5.08 12.408,-7.226 12.408,-9.741 10.897,-11.252 10.897,-20.193 15.507,-20.193

## Other copper
Bot:
  rectangle net +5V: 66.419,-4.896 67.613,-2.94
  rectangle net GND: 65.225,-7.391 84.783,-6.071
  region net +3.3V: 83.583,-2.924 82.39,-2.924 82.39,-4.88 83.583,-4.88
  rectangle net +3.3V: 31.623,-4.616 32.563,-3.194
  region net +5V: 17.877,-3.204 15.5,-3.204 15.5,-4.626 17.877,-4.626
  region net GND: 15.316,-6.699 15.316,-7.994 17.805,-7.994 17.805,-6.699
  region net GND: 32.182,-6.699 34.696,-6.699 34.696,-7.994 32.182,-7.994
  region net GND: 25.857,-6.699 30.505,-6.699 30.505,-7.994 25.857,-7.994
  region net GND: 19.507,-6.699 24.155,-6.699 24.155,-7.994 19.507,-7.994
  region net GND: 19.507,-6.699 24.155,-6.699 24.155,-7.994 19.507,-7.994
  region net GND: 25.857,-6.699 30.505,-6.699 30.505,-7.994 25.857,-7.994
  region net GND: 32.182,-6.699 34.696,-6.699 34.696,-7.994 32.182,-7.994

## Silkscreen, mask and mechanical layers (free items; w line width, h text height)
Top Overlay:
  lines w0.267: 21.524,-5.512 21.527,-5.512 ; 21.806,-5.677 22.352,-5.994 ; 22.352,-6.96 22.355,-6.96 ; 22.352,-6.629 22.352,-5.994 ; 22.898,-5.677 22.352,-5.994 ; 23.188,-5.512 23.19,-5.512 ; 70.4,-2.755 70.403,-2.755 ; 70.682,-2.92 71.228,-3.238 ; 71.228,-4.203 71.231,-4.203 ; 71.228,-3.873 71.228,-3.238 ; 71.774,-2.92 71.228,-3.238 ; 72.064,-2.755 72.067,-2.755
  text "SYZYGY" at 72.6,-4 h1.02
  text "SYZYGY" at 23.724,-6.756 h1.02
  text "SZG-TEMPLATE-STD / Rev A" at 68.5,-9.9 h0.76
  text "SZG-TEMPLATE-TXR / Rev A" at 19.355,-10.922 h0.76
Outline:
  lines w0.254: 0,-70 50,-70 50,0 0,0 0,-70 ; 52.5,-70 97.5,-70 97.5,0 52.5,0 52.5,-70
Mechanical:
  lines w0.2: 52.5,-12 97.5,-12
  text "Carrier board edge" at 64,-14 h1.27

## Dimensions
25,-60 to 50,-70 on Dimensions
75,-60 to 97.5,-70 on Dimensions
83.445,-62.2 to 92.5,-65 on Dimensions
57.5,-65 to 66.555,-62.2 on Dimensions
33.445,-62.2 to 45,-65 on Dimensions
16.555,-62.2 to 5,-65 on Dimensions
107.5,7.5 to 43.91,-7 on MTG Locations
107.5,7.5 to 58,-7 on MTG Locations
92,-7 to 107.5,12.5 on MTG Locations
52.5,0 to 58,-7 on MTG Locations
58,-7 to 92,-7 on MTG Locations
52.5,0 to 58,-7 on MTG Locations
52.5,-50 to 92.5,-65 on MTG Locations
52.5,0 to 57.5,-17 on MTG Locations
52.5,-70 to 57.5,-65 on MTG Locations
52.5,-50 to 57.5,-65 on MTG Locations
52.5,0 to 97.5,0 on Dimensions
52.5,0 to 52.5,-70 on Dimensions
6.09,-7 to 0,0 on MTG Locations
5,-17 to 0,0 on MTG Locations
6.09,-7 to 43.91,-7 on MTG Locations
6.09,-7 to 0,0 on MTG Locations
5,-65 to 0,-70 on MTG Locations
5,-65 to 0,-70 on MTG Locations
0,-70 to 45,-65 on MTG Locations
0,0 to 50,0 on Dimensions
0,0 to 0,-70 on Dimensions